# Altium PCB LedMatrixDisplay.PCBDOC (part 1 of 3)
Units mm, origin at the board's own origin, x right, y up, seen from the top; angles counter-clockwise.
Board outline 305.05 x 54.1 mm, 4 copper layers (Top Layer, POWER, GROUND, Bottom Layer); 103 components, 165 nets, 805 pads, 317 vias.
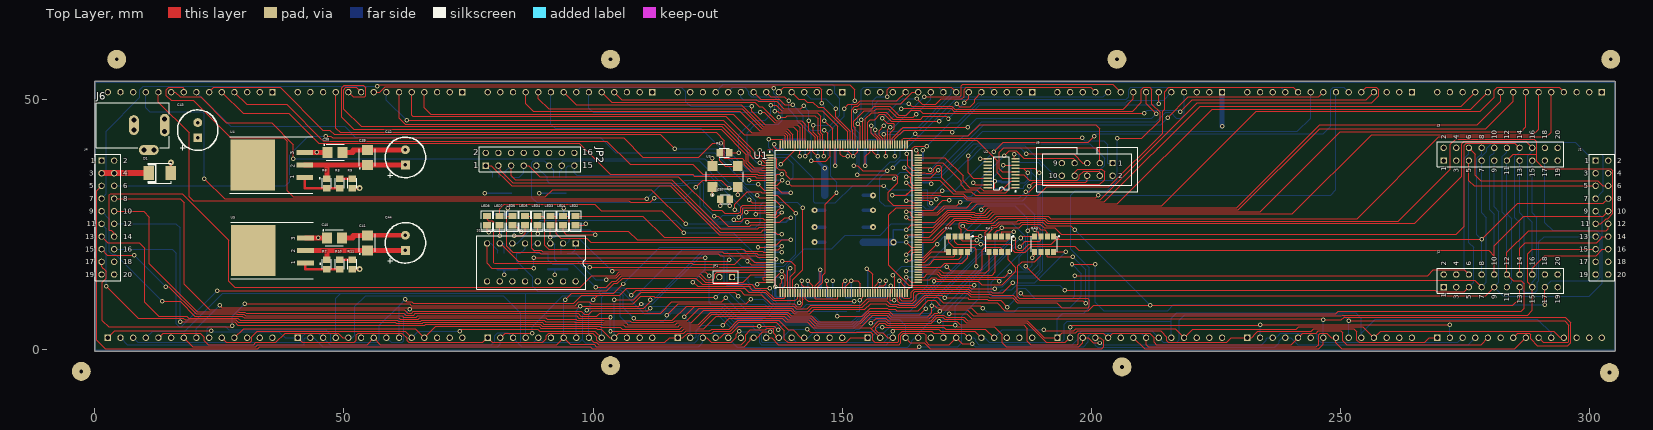
[diagram p0: Top Layer view]
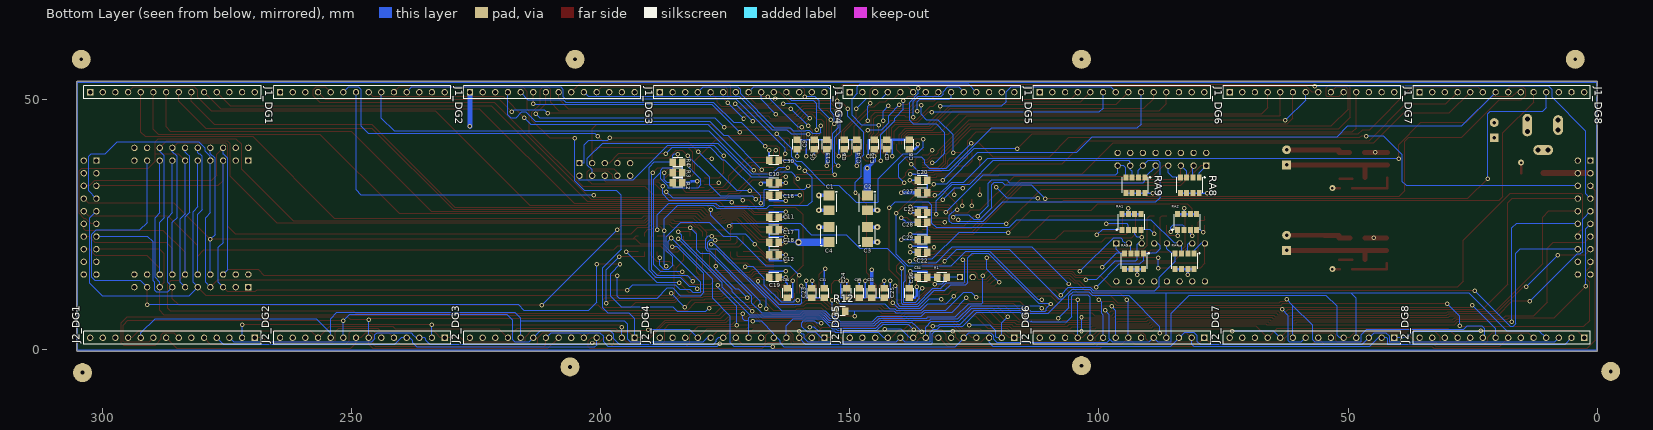
[diagram p1: Bottom Layer view, seen from below]
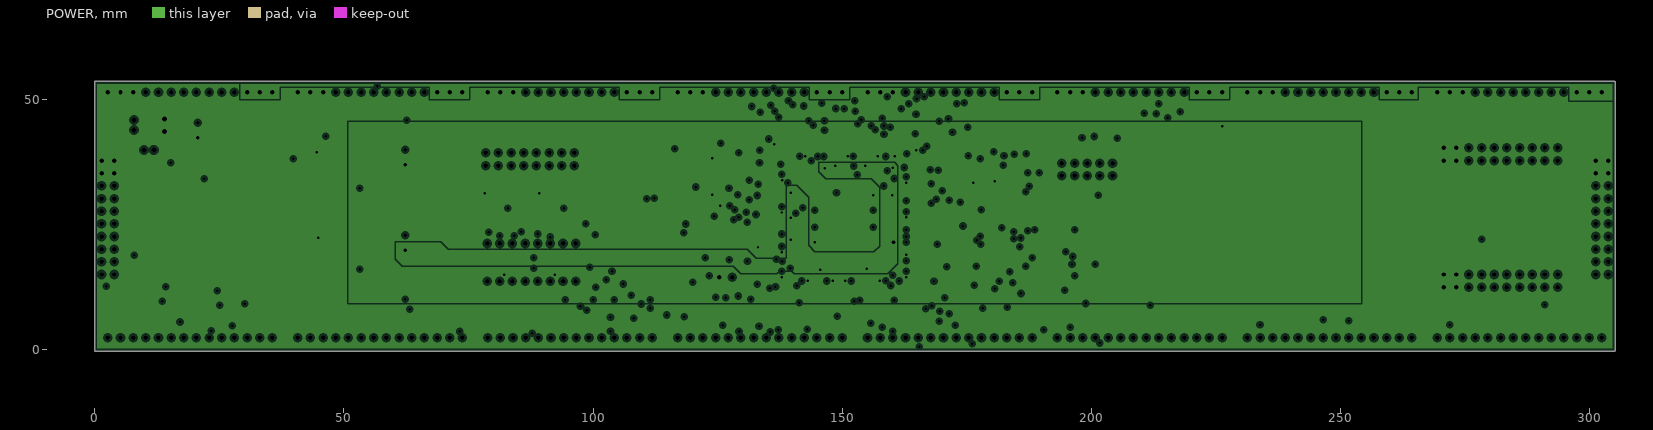
[diagram p2: POWER, clearances drawn from the general rule]
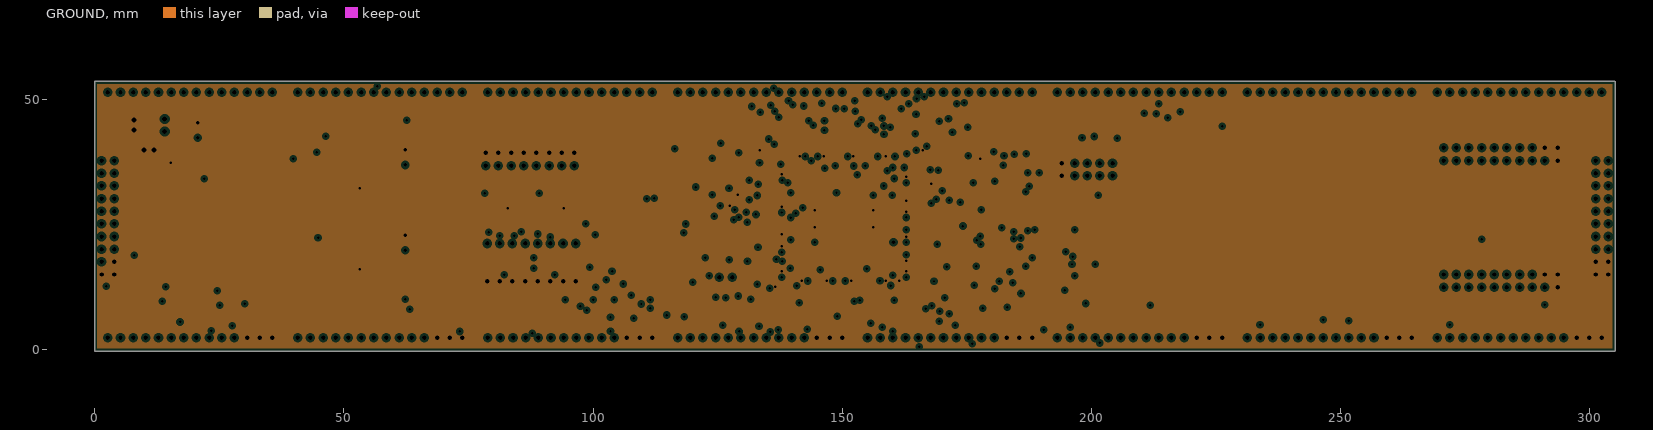
[diagram p3: GROUND, clearances drawn from the general rule]

## Layer stack, top to bottom
Top Layer: signal copper 0.0356
Dielectric: core 0.32, FR-4, Dk 4.8
POWER: plane copper 0.0356, net (Multiple Nets)
Dielectric: prepreg 0.32, FR-4, Dk 4.8
GROUND: plane copper 0.0356, net GND
Dielectric: core 0.32, FR-4, Dk 4.8
Bottom Layer: signal copper 0.0356

## Board outline
304.927,-0.381 ccw(c304.927,-0.254) 305.055,-0.254 305.055,53.594 ccw(c304.927,53.594) 304.927,53.721 0.127,53.721 ccw(c0.127,53.594) 0,53.594 0,-0.254 ccw(c0.127,-0.254) 0.127,-0.381

## Design rules (kind name [scope] priority, off if disabled: settings)
Clearance [All] p1: gap=0.2
FabricationTestPointUsage TestPointUsage [All] p1: valid=0 allowmultiple=FALSE
FabricationTestpoint Testpoint [All] p1: side=3 testpointundercomponent=TRUE minsize=1.016 maxsize=2.54 preferedsize=1.524 minholesize=0 maxholesize=1.016 preferedholesize=0.813 testpointgrid=0.025 allowsidetop=TRUE allowsidebottom=TRUE usegrid=TRUE gridtolerance=0
HoleSize HoleSize_PowerPads [IsPad And (PadXSize_AllLayers <> PadYSize_AllLayers) And OnMultiLayer] p1: absolutevalues=TRUE maxlimit=2.54 minlimit=0 maxpercent=80.000 minpercent=20.000
HoleSize [All] p2: absolutevalues=TRUE maxlimit=2.54 minlimit=0.025 maxpercent=80.000 minpercent=20.000
PlaneClearance [All] p1: clearance=0.508
PlaneConnect [All] p1: planeconnectstyle=Relief reliefexpansion=0.508 reliefentries=4 reliefconductorwidth=0.254 reliefairgap=0.254
PolygonConnect [All] p1: connectstyle=Relief reliefconductorwidth=0.254 reliefentries=4 polygonreliefangle="90 Angle"
RoomDefinition U_FPGA_U1 [InComponentClass('U_FPGA_U1')] p1: confinementstyle=ConfineIn formatcopy=TRUE lockcomponents=FALSE outline 127.635,6.096 175.895,6.096 175.895,46.736 127.635,46.736
RoomDefinition LED_SW [InComponentClass('LED_SW')] p2: confinementstyle=ConfineIn formatcopy=TRUE lockcomponents=FALSE outline 96.647,13.716 122.047,13.716 122.047,37.846 96.647,37.846
RoomDefinition DG8 [InComponentClass('DG8')] p3: confinementstyle=ConfineIn formatcopy=TRUE lockcomponents=FALSE outline 38.227,-0.254 0.127,-0.254 0.127,53.594 38.227,53.594
RoomDefinition DG7 [InComponentClass('DG7')] p4: confinementstyle=ConfineIn formatcopy=TRUE lockcomponents=FALSE outline 76.327,-0.254 38.227,-0.254 38.227,53.594 76.327,53.594
RoomDefinition DG6 [InComponentClass('DG6')] p5: confinementstyle=ConfineIn formatcopy=TRUE lockcomponents=FALSE outline 114.427,-0.254 76.327,-0.254 76.327,53.594 114.427,53.594
RoomDefinition DG5 [InComponentClass('DG5')] p6: confinementstyle=ConfineIn formatcopy=TRUE lockcomponents=FALSE outline 152.527,-0.254 114.427,-0.254 114.427,53.594 152.527,53.594
RoomDefinition DG3 [InComponentClass('DG3')] p7: confinementstyle=ConfineIn formatcopy=TRUE lockcomponents=FALSE outline 228.727,-0.254 190.627,-0.254 190.627,53.594 228.727,53.594
RoomDefinition DG2 [InComponentClass('DG2')] p8: confinementstyle=ConfineIn formatcopy=TRUE lockcomponents=FALSE outline 266.827,-0.254 228.727,-0.254 228.727,53.594 266.827,53.594
RoomDefinition DG1 [InComponentClass('DG1')] p9: confinementstyle=ConfineIn formatcopy=TRUE lockcomponents=FALSE outline 304.927,-0.254 266.827,-0.254 266.827,53.594 304.927,53.594
RoomDefinition DG4 [InComponentClass('DG4')] p10: confinementstyle=ConfineIn formatcopy=TRUE lockcomponents=FALSE outline 190.627,-0.254 152.527,-0.254 152.527,53.594 190.627,53.594
RoomDefinition PWR [InComponentClass('PWR')] p11: confinementstyle=ConfineIn formatcopy=TRUE lockcomponents=FALSE outline 204.597,13.716 270.637,13.716 270.637,41.656 204.597,41.656
RoutingVias ViasStyle_PowerNets [InNetClass('PowerNets')] p1: holewidth=0.5 width=0.9 viastyle="Through Hole" minholewidth=0.5 minwidth=0.9 maxholewidth=0.5 maxwidth=2.5
RoutingVias [All] p2: holewidth=0.5 width=0.9 viastyle="Through Hole" minholewidth=0.5 minwidth=0.9 maxholewidth=0.5 maxwidth=0.9
SilkscreenOverComponentPads [All] p1: minsilkscreentomaskgap=0.254
SolderMaskExpansion [All] p1: expansion=0.102
Width Width_Power [InNetClass('PowerNets')] p1: maxlimit=2 minlimit=0.2 preferedwidth=0.3 toplayer_prefwidth=0.2 minimp=50.000000 maximp=50.000000 favimp=50.000000
Width [All] p2: maxlimit=2 minlimit=0.2 preferedwidth=0.2
22 further rules are at their usual default settings.

## Classes and differential pairs
net class PowerNets: 6V GND VCCINT VCCO
component class DG1: C45_DG1 C46_DG1 D2_DG1 D3_DG1 GNDTP1_DG1 J1_DG1 J2_DG1 Q1_DG1 Q2_DG1 Q3_DG1 Q4_DG1 Q5_DG1 Q6_DG1 Q7_DG1 Q8_DG1 Q9_DG1 Q10_DG1 Q11_DG1 Q12_DG1 Q13_DG1 Q14_DG1 Q15_DG1 Q16_DG1 R12_DG1 R13_DG1 R14_DG1 R15_DG1 R16_DG1 R17_DG1 R18_DG1 R19_DG1 R20_DG1 R21_DG1 R22_DG1 R23_DG1 R24_DG1 R25_DG1 R26_DG1 TB_DG1 U6_DG1 U7_DG1 U8_DG1 U9_DG1
component class DG2: C45_DG2 C46_DG2 D2_DG2 D3_DG2 GNDTP1_DG2 J1_DG2 J2_DG2 Q1_DG2 Q2_DG2 Q3_DG2 Q4_DG2 Q5_DG2 Q6_DG2 Q7_DG2 Q8_DG2 Q9_DG2 Q10_DG2 Q11_DG2 Q12_DG2 Q13_DG2 Q14_DG2 Q15_DG2 Q16_DG2 R12_DG2 R13_DG2 R14_DG2 R15_DG2 R16_DG2 R17_DG2 R18_DG2 R19_DG2 R20_DG2 R21_DG2 R22_DG2 R23_DG2 R24_DG2 R25_DG2 R26_DG2 TB_DG2 U6_DG2 U7_DG2 U8_DG2 U9_DG2
component class DG3: C45_DG3 C46_DG3 D2_DG3 D3_DG3 GNDTP1_DG3 J1_DG3 J2_DG3 Q1_DG3 Q2_DG3 Q3_DG3 Q4_DG3 Q5_DG3 Q6_DG3 Q7_DG3 Q8_DG3 Q9_DG3 Q10_DG3 Q11_DG3 Q12_DG3 Q13_DG3 Q14_DG3 Q15_DG3 Q16_DG3 R12_DG3 R13_DG3 R14_DG3 R15_DG3 R16_DG3 R17_DG3 R18_DG3 R19_DG3 R20_DG3 R21_DG3 R22_DG3 R23_DG3 R24_DG3 R25_DG3 R26_DG3 TB_DG3 U6_DG3 U7_DG3 U8_DG3 U9_DG3
component class DG4: C45_DG4 C46_DG4 D2_DG4 D3_DG4 GNDTP1_DG4 J1_DG4 J2_DG4 Q1_DG4 Q2_DG4 Q3_DG4 Q4_DG4 Q5_DG4 Q6_DG4 Q7_DG4 Q8_DG4 Q9_DG4 Q10_DG4 Q11_DG4 Q12_DG4 Q13_DG4 Q14_DG4 Q15_DG4 Q16_DG4 R12_DG4 R13_DG4 R14_DG4 R15_DG4 R16_DG4 R17_DG4 R18_DG4 R19_DG4 R20_DG4 R21_DG4 R22_DG4 R23_DG4 R24_DG4 R25_DG4 R26_DG4 TB_DG4 U6_DG4 U7_DG4 U8_DG4 U9_DG4
component class DG5: C45_DG5 C46_DG5 D2_DG5 D3_DG5 GNDTP1_DG5 J1_DG5 J2_DG5 Q1_DG5 Q2_DG5 Q3_DG5 Q4_DG5 Q5_DG5 Q6_DG5 Q7_DG5 Q8_DG5 Q9_DG5 Q10_DG5 Q11_DG5 Q12_DG5 Q13_DG5 Q14_DG5 Q15_DG5 Q16_DG5 R12_DG5 R13_DG5 R14_DG5 R15_DG5 R16_DG5 R17_DG5 R18_DG5 R19_DG5 R20_DG5 R21_DG5 R22_DG5 R23_DG5 R24_DG5 R25_DG5 R26_DG5 TB_DG5 U6_DG5 U7_DG5 U8_DG5 U9_DG5
component class DG6: C45_DG6 C46_DG6 D2_DG6 D3_DG6 GNDTP1_DG6 J1_DG6 J2_DG6 Q1_DG6 Q2_DG6 Q3_DG6 Q4_DG6 Q5_DG6 Q6_DG6 Q7_DG6 Q8_DG6 Q9_DG6 Q10_DG6 Q11_DG6 Q12_DG6 Q13_DG6 Q14_DG6 Q15_DG6 Q16_DG6 R12_DG6 R13_DG6 R14_DG6 R15_DG6 R16_DG6 R17_DG6 R18_DG6 R19_DG6 R20_DG6 R21_DG6 R22_DG6 R23_DG6 R24_DG6 R25_DG6 R26_DG6 TB_DG6 U6_DG6 U7_DG6 U8_DG6 U9_DG6
component class DG7: C45_DG7 C46_DG7 D2_DG7 D3_DG7 GNDTP1_DG7 J1_DG7 J2_DG7 Q1_DG7 Q2_DG7 Q3_DG7 Q4_DG7 Q5_DG7 Q6_DG7 Q7_DG7 Q8_DG7 Q9_DG7 Q10_DG7 Q11_DG7 Q12_DG7 Q13_DG7 Q14_DG7 Q15_DG7 Q16_DG7 R12_DG7 R13_DG7 R14_DG7 R15_DG7 R16_DG7 R17_DG7 R18_DG7 R19_DG7 R20_DG7 R21_DG7 R22_DG7 R23_DG7 R24_DG7 R25_DG7 R26_DG7 TB_DG7 U6_DG7 U7_DG7 U8_DG7 U9_DG7
component class DG8: C45_DG8 C46_DG8 D2_DG8 D3_DG8 GNDTP1_DG8 J1_DG8 J2_DG8 Q1_DG8 Q2_DG8 Q3_DG8 Q4_DG8 Q5_DG8 Q6_DG8 Q7_DG8 Q8_DG8 Q9_DG8 Q10_DG8 Q11_DG8 Q12_DG8 Q13_DG8 Q14_DG8 Q15_DG8 Q16_DG8 R12_DG8 R13_DG8 R14_DG8 R15_DG8 R16_DG8 R17_DG8 R18_DG8 R19_DG8 R20_DG8 R21_DG8 R22_DG8 R23_DG8 R24_DG8 R25_DG8 R26_DG8 TB_DG8 U6_DG8 U7_DG8 U8_DG8 U9_DG8
component class LED_SW: JP2 LED1 LED2 LED3 LED4 LED5 LED6 LED7 LED8 RA1 RA2 RA3 RA4 RA8 RA9 S1
component class LedMatrixDisplay: C37 EN1 J1 J2 J3 J4 J5 R5 R27 RA5 RA6 RA7 U3
component class PWR: C38 C39 C40 C41 C42 C43 C44 D1 J6 R6 R7 R8 R9 R10 R11 U4 U5
component class U_FPGA_U1_Auto: U1
component class U_FPGA_U1: C1 C2 C3 C4 C5 C6 C7 C8 C9 C10 C11 C12 C13 C14 C15 C16 C17 C18 C19 C20 C21 C22 C23 C24 C25 C26 C27 C28 C29 C30 C31 C32 C34 C35 C36 JP1 R1 R2 R3 R4 U2
net class ADDR[2..0]: ADDR0 ADDR1 ADDR2
net class BOARD_ADDR[7..0]: SW0 SW1 SW2 SW3 SW4 SW5 SW6 SW7
net class DATA[7..0]: DATA0 DATA1 DATA2 DATA3 DATA4 DATA5 DATA6 DATA7
net class GREEN[4..0]: GREEN0 GREEN1 GREEN2 GREEN3 GREEN4
net class LED[7..0]: LED0 LED1 LED2 LED3 LED4 LED5 LED6 LED7
net class RED[4..0]: RED0 RED1 RED2 RED3 RED4
net class ROWA[6..0]: ROWA0 ROWA1 ROWA2 ROWA3 ROWA4 ROWA5 ROWA6
net class ROWB[6..0]: ROWB0 ROWB1 ROWB2 ROWB3 ROWB4 ROWB5 ROWB6
net class ROWC[6..0]: ROWC0 ROWC1 ROWC2 ROWC3 ROWC4 ROWC5 ROWC6
net class ROWD[6..0]: ROWD0 ROWD1 ROWD2 ROWD3 ROWD4 ROWD5 ROWD6
net class ROWE[6..0]: ROWE0 ROWE1 ROWE2 ROWE3 ROWE4 ROWE5 ROWE6
net class ROWF[6..0]: ROWF0 ROWF1 ROWF2 ROWF3 ROWF4 ROWF5 ROWF6
net class ROWG[6..0]: ROWG0 ROWG1 ROWG2 ROWG3 ROWG4 ROWG5 ROWG6
net class ROWH[6..0]: ROWH0 ROWH1 ROWH2 ROWH3 ROWH4 ROWH5 ROWH6
net class JUMPERS[7..0]: JUMPERS0 JUMPERS1 JUMPERS2 JUMPERS3 JUMPERS4 JUMPERS5 JUMPERS6 JUMPERS7
channel class DigitHolder: DG1 DG2 DG3 DG4 DG5 DG6 DG7 DG8
net class ENABLE[7..0]: ENABLE0 ENABLE1 ENABLE2 ENABLE3 ENABLE4 ENABLE5 ENABLE6 ENABLE7

## Components (designator, comment, footprint, x,y, rotation, side; value= is the part's Value field where it differs from the comment)
C1 "10uF" MCCT-B 154.177,29.373 r270 bottom locked
C2 "10uF" MCCT-B 146.477,29.373 r270 bottom locked
C3 "10uF" MCCT-B 146.477,22.973 r90 bottom locked
C4 "10uF" MCCT-B 154.177,22.973 r90 bottom locked
C5 "0.1uF" CC2012-0805 157.077,41.073 r270 bottom
C6 "0.1uF" CC2012-0805 151.077,41.073 r270 bottom
C7 "0.1uF" CC2012-0805 142.577,41.073 r270 bottom
C8 "0.1uF" CC2012-0805 138.077,41.073 r270 bottom
C9 "0.1uF" CC2012-0805 160.577,41.073 r270 bottom
C10 "0.1uF" CC2012-0805 165.227,33.423 r180 bottom
C11 "0.1uF" CC2012-0805 165.227,26.423 r180 bottom
C12 "0.1uF" CC2012-0805 165.227,18.923 r180 bottom
C13 "0.1uF" CC2012-0805 154.577,41.073 r270 bottom
C14 "0.1uF" CC2012-0805 148.577,41.073 r270 bottom
C15 "0.1uF" CC2012-0805 145.077,41.073 r270 bottom
C16 "0.1uF" CC2012-0805 165.227,30.923 r180 bottom
C17 "0.1uF" CC2012-0805 165.227,23.923 r180 bottom
C18 "0.1uF" CC2012-0805 165.227,21.423 r180 bottom
C19 "0.1uF" CC2012-0805 165.227,14.423 r0 bottom
C20 "0.1uF" CC2012-0805 135.427,33.923 r180 bottom
C21 "0.1uF" CC2012-0805 135.427,27.423 r180 bottom
C22 "0.1uF" CC2012-0805 135.427,19.423 r180 bottom
C23 "0.1uF" CC2012-0805 157.577,11.273 r270 bottom
C24 "0.1uF" CC2012-0805 150.577,11.273 r270 bottom
C25 "0.1uF" CC2012-0805 143.077,11.273 r270 bottom
C26 "0.1uF" CC2012-0805 138.077,11.273 r270 bottom
C27 "0.1uF" CC2012-0805 135.427,31.423 r180 bottom
C28 "0.1uF" CC2012-0805 135.427,25.423 r180 bottom
C29 "0.1uF" CC2012-0805 135.427,21.923 r180 bottom
C30 "0.1uF" CC2012-0805 165.227,37.923 r0 bottom
C31 "0.1uF" CC2012-0805 155.077,11.273 r270 bottom
C32 "0.1uF" CC2012-0805 145.577,11.273 r270 bottom
C34 "100nF" CC2012-0805 135.427,14.423 r0 bottom
C35 "100nF" CC2012-0805 148.077,11.273 r90 bottom
C36 "100nF" CC2012-0805 162.577,11.273 r90 bottom
C37 "100nF" CC2012-0805 126.492,30.099 r0 top
C38 "10uF" MCCT-B 48.26,39.497 r0 top locked
C39 "10uF" MCCT-B 54.737,38.457 r90 top locked
C40 "10uF" MCCT-B 48.109,22.352 r0 top locked
C41 "10uF" MCCT-B 54.737,21.312 r90 top locked
C42 "470uF 16V" RB8/3.5 62.357,38.481 r180 top
C43 "470uF 16V" RB8/3.5 20.701,43.942 r180 top
C44 "470uF 16V" RB8/3.5 62.357,21.336 r180 top
D1 "SMBJ5341B" DO214 13.081,35.306 r180 top
J1 "Header 20" HDR2X10 301.117,37.846 r270 top
J1_DG1 "Header 14" HDR1X14 302.387,51.562 r180 bottom (schematic designator J1)
J1_DG2 "Header 14" HDR1X14 264.287,51.562 r180 bottom (schematic designator J1)
J1_DG3 "Header 14" HDR1X14 226.187,51.562 r180 bottom (schematic designator J1)
J1_DG4 "Header 14" HDR1X14 188.087,51.562 r180 bottom (schematic designator J1)
J1_DG5 "Header 14" HDR1X14 149.987,51.562 r180 bottom (schematic designator J1)
J1_DG6 "Header 14" HDR1X14 111.887,51.562 r180 bottom (schematic designator J1)
J1_DG7 "Header 14" HDR1X14 73.787,51.562 r180 bottom (schematic designator J1)
J1_DG8 "Header 14" HDR1X14 35.687,51.562 r180 bottom (schematic designator J1)
J2 "Header 20" HDR2X10 270.637,12.446 r0 top
J2_DG1 "Header 14" HDR1X14 269.367,2.286 r0 bottom (schematic designator J2)
J2_DG2 "Header 14" HDR1X14 231.267,2.286 r0 bottom (schematic designator J2)
J2_DG3 "Header 14" HDR1X14 193.167,2.286 r0 bottom (schematic designator J2)
J2_DG4 "Header 14" HDR1X14 155.067,2.286 r0 bottom (schematic designator J2)
J2_DG5 "Header 14" HDR1X14 116.967,2.286 r0 bottom (schematic designator J2)
J2_DG6 "Header 14" HDR1X14 78.867,2.286 r0 bottom (schematic designator J2)
J2_DG7 "Header 14" HDR1X14 40.767,2.286 r0 bottom (schematic designator J2)
J2_DG8 "Header 14" HDR1X14 2.667,2.286 r0 bottom (schematic designator J2)
J3 "Header 20" HDR2X10 270.637,37.846 r0 top
J4 "Header 20" HDR2X10 1.397,37.846 r270 top
J5 "70246-1022" HDR2X5_LP 204.217,37.338 r180 top
J6 "KLD-0202-B" KLD-0202 0.381,44.958 r0 top
JP1 "Header 2" HDR1X2 127.889,14.478 r180 top
JP2 "Header 8X2" HDR2X8 78.487,36.83 r0 top
LED1 "HSMH-C170" "SMD _LED" 93.98,25.781 r90 top
LED2 "HSMH-C170" "SMD _LED" 96.52,25.781 r90 top
LED3 "HSMH-C170" "SMD _LED" 91.44,25.781 r90 top
LED4 "HSMH-C170" "SMD _LED" 88.9,25.781 r90 top
LED5 "HSMH-C170" "SMD _LED" 86.36,25.781 r90 top
LED6 "HSMH-C170" "SMD _LED" 83.82,25.781 r90 top
LED7 "HSMH-C170" "SMD _LED" 81.28,25.781 r90 top
LED8 "HSMH-C170" "SMD _LED" 78.74,25.781 r90 top
R1 "1K" CC2012-0805 131.495,14.423 r180 bottom
R2 "4K7" CC2012-0805 184.531,33.401 r0 bottom
R3 "4K7" CC2012-0805 184.531,35.433 r0 bottom
R4 "4K7" CC2012-0805 184.531,37.465 r0 bottom
R5 "33R" CC2012-0805 126.365,39.37 r0 top
R6 "120R" CC2012-0805 46.609,33.274 r270 top locked
R7 "120R" CC2012-0805 46.609,17.018 r270 top locked
R8 "100R" CC2012-0805 49.149,33.274 r90 top locked
R9 "100R" CC2012-0805 51.689,33.274 r90 top locked
R10 "47R" CC2012-0805 49.149,17.018 r90 top locked
R11 "5R6" CC2012-0805 51.689,17.018 r270 top locked
R12 "47R" CC2012-0805 151.892,7.62 r180 bottom
RA1 "270R" MNR34 93.472,25.527 r90 bottom
RA2 "270R" MNR34 82.296,25.527 r90 bottom
RA3 "4K7" MNR34 92.964,17.653 r270 bottom
RA4 "4K7" MNR34 82.804,17.653 r270 bottom
RA5 "47R" MNR34 190.501,21.082 r270 top
RA6 "47R" MNR34 173.229,21.082 r270 top
RA7 "47R" MNR34 181.357,21.082 r270 top
RA8 "4K7" MNR34 81.788,32.893 r270 bottom
RA9 "4K7" MNR34 92.71,32.893 r270 bottom
S1 "A6ER-8104" DIP-16-KEY 96.52,21.209 r180 top
U1 "XC2S300E-6PQ208C" PQ208 150.327,26.173 r0 top locked
U2 "XCF02SVO20C" VO20 181.991,35.306 r90 top
U3 "QSMO_4200" QSMO_4200 123.952,32.131 r0 top
U4 "LM1084IS-ADJ" TO-263 42.164,34.417 r90 top
U5 "LM1084IS-ADJ" TO-263 42.291,17.272 r90 top

## Footprints (in the part's own frame and the unit in brackets; to place one, negate y for a bottom-side part, rotate by r counter-clockwise, add the part's x,y. Pads: shape width x height; smd on the part's side, far side on the other; paste and mask are expansions set on the pad)
CC2012-0805 [mm]
  rect 1.3x1.5 smd: 1(-0.95,0) 2(0.95,0)
  silkscreen extent -1,-0.9 1,0.9
DIP-16-KEY [mm]
  rect 1.27x1.27 hole 0.9: 1(0,0)
  round 1.27 hole 0.9: 2(2.54,0) 3(5.08,0) 4(7.62,0) 5(10.16,0) 6(12.7,0) 7(15.24,0) 8(17.78,0) 9(17.78,7.62) 10(15.24,7.62) 11(12.7,7.62) 12(10.16,7.62) 13(7.62,7.62) 14(5.08,7.62) 15(2.54,7.62) 16(0,7.62)
  silkscreen extent -2.05,-1.59 19.83,9.2
DO214 [mil]
  rect 85x110 smd: 1(-87.5,0) 2(87.5,0)
  silkscreen extent -90,-78 90,78
HDR1X2 [mm]
  rect 1.27x1.27 hole 0.9: 1(0,0)
  round 1.27 hole 0.9: 2(2.54,0)
  silkscreen extent -1.27,-1.27 3.81,1.27
HDR1X14 [mm]
  rect 1.27x1.27 hole 0.9: 1(0,0)
  round 1.27 hole 0.9: 2(2.54,0) 3(5.08,0) 4(7.62,0) 5(10.16,0) 6(12.7,0) 7(15.24,0) 8(17.78,0) 9(20.32,0) 10(22.86,0) 11(25.4,0) 12(27.94,0) 13(30.48,0) 14(33.02,0)
  silkscreen extent -1.27,-1.27 34.29,1.27
HDR2X5_LP [mm]
  rect 1.27x1.27 hole 0.9: 1(0,0)
  round 1.27 hole 0.9: 2(0,2.54) 3(2.54,0) 4(2.54,2.54) 5(5.08,0) 6(5.08,2.54) 7(7.62,0) 8(7.62,2.54) 9(10.16,0) 10(10.16,2.54)
  silkscreen extent -5.08,-3.18 15.24,5.72
HDR2X8 [mm]
  rect 1.27x1.27 hole 0.9: 1(0,0)
  round 1.27 hole 0.9: 2(0,2.54) 3(2.54,0) 4(2.54,2.54) 5(5.08,0) 6(5.08,2.54) 7(7.62,0) 8(7.62,2.54) 9(10.16,0) 10(10.16,2.54) 11(12.7,0) 12(12.7,2.54) 13(15.24,0) 14(15.24,2.54) 15(17.78,0) 16(17.78,2.54)
  silkscreen extent -1.27,-1.27 19.05,3.81
HDR2X10 [mm]
  rect 1.27x1.27 hole 0.9: 1(0,0)
  round 1.27 hole 0.9: 2(0,2.54) 3(2.54,0) 4(2.54,2.54) 5(5.08,0) 6(5.08,2.54) 7(7.62,0) 8(7.62,2.54) 9(10.16,0) 10(10.16,2.54) 11(12.7,0) 12(12.7,2.54) 13(15.24,0) 14(15.24,2.54) 15(17.78,0) 16(17.78,2.54) 17(20.32,0) 18(20.32,2.54) 19(22.86,0) 20(22.86,2.54)
  silkscreen extent -1.27,-1.27 24.13,3.81
KLD-0202 [mm] "PCB Mount DC Power Jack with 2.1mm or 2.5mm center pin"
  oval 2x4.5 all layers, no hole: 1(13.7,0)
  round 1.5 hole 1: 1A(13.7,-1.25) 1B(13.7,1.25) 2A(9.5,-5) 2B(11.5,-5) 3A(7.5,-1) 3B(7.5,1)
  oval 4x2 all layers, no hole: 2(10.5,-5)
  oval 2x4 all layers, no hole: 3(7.5,0)
  silkscreen extent 0,-4.5 14.6,4.5
MCCT-B [mm]
  rect 2x2.2 smd: 1(-1.5,0) 2(1.5,0)
  silkscreen extent -2.3,-1.6 1.8,1.6
MNR34 [mm]
  rect 1.2x1 smd: 1(-1.575,1.905) 2(-1.575,0.635) 3(-1.575,-0.635) 4(-1.575,-1.905) 5(1.575,-1.905) 6(1.575,-0.635) 7(1.575,0.635) 8(1.575,1.905)
  silkscreen extent -1.67,-2.62 1.55,3.07
PQ208 [mm] "208-Pin Plastic Quad Flat Pack (PQ208)"
  rect 1.55x0.3 smd: 1(-14.9,12.75) 2(-14.9,12.25) 3(-14.9,11.75) 4(-14.9,11.25) 5(-14.9,10.75) 6(-14.9,10.25) 7(-14.9,9.75) 8(-14.9,9.25) 9(-14.9,8.75) 10(-14.9,8.25) 11(-14.9,7.75) 12(-14.9,7.25) 13(-14.9,6.75) 14(-14.9,6.25) 15(-14.9,5.75) 16(-14.9,5.25) 17(-14.9,4.75) 18(-14.9,4.25) 19(-14.9,3.75) 20(-14.9,3.25) 21(-14.9,2.75) 22(-14.9,2.25) 23(-14.9,1.75) 24(-14.9,1.25) 25(-14.9,0.75) 26(-14.9,0.25) 27(-14.9,-0.25) 28(-14.9,-0.75) 29(-14.9,-1.25) 30(-14.9,-1.75) 31(-14.9,-2.25) 32(-14.9,-2.75) 33(-14.9,-3.25) 34(-14.9,-3.75) 35(-14.9,-4.25) 36(-14.9,-4.75) 37(-14.9,-5.25) 38(-14.9,-5.75) 39(-14.9,-6.25) 40(-14.9,-6.75) 41(-14.9,-7.25) 42(-14.9,-7.75) 43(-14.9,-8.25) 44(-14.9,-8.75) 45(-14.9,-9.25) 46(-14.9,-9.75) 47(-14.9,-10.25) 48(-14.9,-10.75) 49(-14.9,-11.25) 50(-14.9,-11.75) 51(-14.9,-12.25) 52(-14.9,-12.75) 105(14.9,-12.75) 106(14.9,-12.25) 107(14.9,-11.75) 108(14.9,-11.25) 109(14.9,-10.75) 110(14.9,-10.25) 111(14.9,-9.75) 112(14.9,-9.25) 113(14.9,-8.75) 114(14.9,-8.25) 115(14.9,-7.75) 116(14.9,-7.25) 117(14.9,-6.75) 118(14.9,-6.25) 119(14.9,-5.75) 120(14.9,-5.25) 121(14.9,-4.75) 122(14.9,-4.25) 123(14.9,-3.75) 124(14.9,-3.25) 125(14.9,-2.75) 126(14.9,-2.25) 127(14.9,-1.75) 128(14.9,-1.25) 129(14.9,-0.75) 130(14.9,-0.25) 131(14.9,0.25) 132(14.9,0.75) 133(14.9,1.25) 134(14.9,1.75) 135(14.9,2.25) 136(14.9,2.75) 137(14.9,3.25) 138(14.9,3.75) 139(14.9,4.25) 140(14.9,4.75) 141(14.9,5.25) 142(14.9,5.75) 143(14.9,6.25) 144(14.9,6.75) 145(14.9,7.25) 146(14.9,7.75) 147(14.9,8.25) 148(14.9,8.75) 149(14.9,9.25) 150(14.9,9.75) 151(14.9,10.25) 152(14.9,10.75) 153(14.9,11.25) 154(14.9,11.75) 155(14.9,12.25) 156(14.9,12.75)
  rect 0.3x1.55 smd: 53(-12.75,-14.9) 54(-12.25,-14.9) 55(-11.75,-14.9) 56(-11.25,-14.9) 57(-10.75,-14.9) 58(-10.25,-14.9) 59(-9.75,-14.9) 60(-9.25,-14.9) 61(-8.75,-14.9) 62(-8.25,-14.9) 63(-7.75,-14.9) 64(-7.25,-14.9) 65(-6.75,-14.9) 66(-6.25,-14.9) 67(-5.75,-14.9) 68(-5.25,-14.9) 69(-4.75,-14.9) 70(-4.25,-14.9) 71(-3.75,-14.9) 72(-3.25,-14.9) 73(-2.75,-14.9) 74(-2.25,-14.9) 75(-1.75,-14.9) 76(-1.25,-14.9) 77(-0.75,-14.9) 78(-0.25,-14.9) 79(0.25,-14.9) 80(0.75,-14.9) 81(1.25,-14.9) 82(1.75,-14.9) 83(2.25,-14.9) 84(2.75,-14.9) 85(3.25,-14.9) 86(3.75,-14.9) 87(4.25,-14.9) 88(4.75,-14.9) 89(5.25,-14.9) 90(5.75,-14.9) 91(6.25,-14.9) 92(6.75,-14.9) 93(7.25,-14.9) 94(7.75,-14.9) 95(8.25,-14.9) 96(8.75,-14.9) 97(9.25,-14.9) 98(9.75,-14.9) 99(10.25,-14.9) 100(10.75,-14.9) 101(11.25,-14.9) 102(11.75,-14.9) 103(12.25,-14.9) 104(12.75,-14.9) 157(12.75,14.9) 158(12.25,14.9) 159(11.75,14.9) 160(11.25,14.9) 161(10.75,14.9) 162(10.25,14.9) 163(9.75,14.9) 164(9.25,14.9) 165(8.75,14.9) 166(8.25,14.9) 167(7.75,14.9) 168(7.25,14.9) 169(6.75,14.9) 170(6.25,14.9) 171(5.75,14.9) 172(5.25,14.9) 173(4.75,14.9) 174(4.25,14.9) 175(3.75,14.9) 176(3.25,14.9) 177(2.75,14.9) 178(2.25,14.9) 179(1.75,14.9) 180(1.25,14.9) 181(0.75,14.9) 182(0.25,14.9) 183(-0.25,14.9) 184(-0.75,14.9) 185(-1.25,14.9) 186(-1.75,14.9) 187(-2.25,14.9) 188(-2.75,14.9) 189(-3.25,14.9) 190(-3.75,14.9) 191(-4.25,14.9) 192(-4.75,14.9) 193(-5.25,14.9) 194(-5.75,14.9) 195(-6.25,14.9) 196(-6.75,14.9) 197(-7.25,14.9) 198(-7.75,14.9) 199(-8.25,14.9) 200(-8.75,14.9) 201(-9.25,14.9) 202(-9.75,14.9) 203(-10.25,14.9) 204(-10.75,14.9) 205(-11.25,14.9) 206(-11.75,14.9) 207(-12.25,14.9) 208(-12.75,14.9)
  silkscreen extent -15.02,-13.73 13.72,13.73
QSMO_4200 [mm]
  rect 2x2 smd: 1(0,0.4) 2(5.08,0.4) 3(5.08,4.6) 4(0,4.6)
  silkscreen extent -1.19,-1.31 6.22,4.95
RB8/3.5 [mil]
  rect 70x70 hole 27.56: 1(0,60)
  round 70 hole 27.56: 2(0,-60)
  silkscreen extent -160,-160 160,160
"SMD _LED" [mm]
  rect 1.3x1.6 smd: 1(0.94,0) 2(-0.96,0)
  silkscreen extent -2.14,-1.15 1.99,1.15
TO-263 [mm]
  rect 1x3.4 smd: 1(0,0) 2(2.54,0) 3(5.08,0)
  rect 10.25x8.9 smd: 4(2.54,10.45)
  silkscreen extent -3.1,-3.13 8.2,15
VO20 [mm]
  rect 0.3x1.65 smd: 1(-2.929,-2.766) 2(-2.279,-2.766) 3(-1.629,-2.766) 4(-0.979,-2.766) 5(-0.329,-2.766) 6(0.321,-2.766) 7(0.971,-2.766) 8(1.621,-2.766) 9(2.271,-2.766) 10(2.921,-2.766) 11(2.921,2.784) 12(2.271,2.784) 13(1.621,2.784) 14(0.971,2.784) 15(0.321,2.784) 16(-0.329,2.784) 17(-0.979,2.784) 18(-1.629,2.784) 19(-2.279,2.784) 20(-2.929,2.784)
  silkscreen extent -3.75,-2.89 3.3,1.56

## Part data
C1 C2 C3 C4 C38 C39 C40 C41 C42 C43 C44: library part CAP_POLAR, "Polar Capacitor"
C5 C6 C7 C8 C9 C10 C11 C12 C13 C14 C15 C16 C17 C18 C19 C20 C21 C22 C23 C24 C25 C26 C27 C28 C29 C30 C31 C32 C34 C35 C36 C37: library part CAP, "Capacitor"
D1: library part BZG03C13, "Zener Diode, 6.2V, 5W"
J1 J2 J3 J4: "Header, 20-Pin"
J1_DG1 J1_DG2 J1_DG3 J1_DG4 J1_DG5 J1_DG6 J1_DG7 J1_DG8 J2_DG1 J2_DG2 J2_DG3 J2_DG4 J2_DG5 J2_DG6 J2_DG7 J2_DG8: "Header, 14-Pin"
J5: library part "Header 5X2", "Header, 5-Pin, Dual row"
J6: "Low Voltage Power Supply Connector"
JP1: "Header, 2-Pin"
JP2: "Header, 8-Pin, Dual row"
LED1 LED2 LED3 LED4 LED5 LED6 LED7 LED8: library part HSMX-C670, "Typical RED GaAs SMD LED Agilent make"
R1 R2 R3 R4 R5 R6 R7 R8 R9 R10 R11 R12: library part RES, "Resistor"
RA1 RA2 RA3 RA4 RA5 RA6 RA7 RA8 RA9: library part MNR34, "3216x4 Resistor Array"
S1: "DIP Switch Side actuator long liver Piano Key"
U1: "Spartan-IIE 1.8V FPGA, 208-Pin PQFP, Standard Performance, Commercial Grade"
U2: "XCF00S Series, Platform Flash In-System Programmable Configuration 3.3V PROM, 20-Pin TSOP, 2-Megabit, Commercial Grade"
U3: "Surface Mount Crystal Oscillator"
U4 U5: "5A Low Dropout Possitive Regulators"

## Free pads (board coordinates)
  round 3.81 hole 0.762: 1(4.445,58.166) 2(304.165,58.166) 3(303.911,-4.699) 4(-2.667,-4.445) 5(103.505,58.166) 6(205.105,58.166) 7(103.505,-3.302) 8(206.121,-3.556)

## Via types
v1: diameter 0.9, hole 0.5, Top Layer to Bottom Layer, 307 vias
v2: diameter 1.2, hole 0.5, Top Layer to Bottom Layer, 9 vias
v3: diameter 1.27, hole 0.711, Top Layer to Bottom Layer, 1 vias

## Nets (pads, with @x,y where several pads share a name; then routed paths per layer and width w, separated by ;. In a path a pad name is that pad's centre, name@x,y a point inside that pad or via, vN(x,y) a via of type N, cw(c..) or ccw(c..) an arc to the next point about the centre after c; other vN are vias at no path point)
6V: C38.1 C40.1 C43.1 D1.2 J1.1 J1.2 J1.3 J1.4 J1_DG1.12 J1_DG1.13 J1_DG1.14 J1_DG2.12 J1_DG2.13 J1_DG2.14 J1_DG3.12 J1_DG3.13 J1_DG3.14 J1_DG4.12 J1_DG4.13 J1_DG4.14 J1_DG5.12 J1_DG5.13 J1_DG5.14 J1_DG6.12 J1_DG6.13 J1_DG6.14 J1_DG7.12 J1_DG7.13 J1_DG7.14 J1_DG8.12 J1_DG8.13 J1_DG8.14 J2.1 J2.2 J2.3 J2.4 J3.1 J3.2 J3.3 J3.4 J4.1 J4.2 J4.3 J4.4 J6.1 J6.1A J6.1B U4.3 U5.3 | length 18.4
  Top Layer w1: U4.3@42.164,39.497 v1(44.577,39.497) C38.1@46.76,39.497 ; U5.3@42.291,22.352 v1(44.831,22.352) C40.1@46.609,22.352
  Top Layer w1.2: J4.3@1.397,35.306 J4.4@3.937,35.306 D1.2@10.859,35.306
ADDR0: RA7.5 U1.110 | length 18.3
  Top Layer w0.2: U1.110@165.227,15.923 169.599,15.923 170.231,15.291 178.791,15.291 179.452,15.952 RA7.5@179.452,19.507
ADDR1: RA7.6 U1.109 | length 20
  Top Layer w0.2: U1.109@165.227,15.423 166.193,15.423 166.263,15.494 169.215,15.494 169.825,14.884 180.061,14.884 180.722,15.545 RA7.6@180.722,19.507
ADDR2: RA7.7 U1.97 | length 33.3
  Top Layer w0.2: U1.97@159.577,11.273 159.577,9.779 v1(160.401,9.779) ; v1(170.942,16.51) 171.755,15.697 177.673,15.697 178.08,16.104 178.08,19.812 178.689,20.422 181.738,20.422 181.992,20.168 RA7.7@181.992,19.507
  Bottom Layer w0.2: v1(160.401,9.779) 161.163,9.779 161.163,9.373 163.653,9.373 167.132,12.852 167.132,14.275 169.368,16.51 v1(170.942,16.51)
CCLK: U1.155 U2.3 | length 23.6
  Top Layer w0.2: U1.155@165.227,38.423 170.568,38.423 174.244,34.747 174.244,33.782 175.591,32.436 177.724,32.436 178.334,31.826 181.915,31.826 183.766,33.677 U2.3@184.758,33.677
CLK_MHZ40: R5.2 U1.185 | length 34.3
  Top Layer w0.2: R5.2@127.315,39.37 v1(129.21,39.37) ; v1(135.662,48.946) 136.779,48.946 137.897,47.828 145.974,47.828 149.077,44.725 U1.185@149.077,41.073
  Bottom Layer w0.2: v1(129.21,39.37) 129.21,42.977 132.207,45.974 134.519,45.974 135.662,47.117 v1(135.662,48.946)
CNT5: J1.5 J2.5 J3.5 J4.5 RA5.4 | length 403.1
  Top Layer w0.2: J4.5@1.397,32.766 0.458,31.826 0.458,1.778 2.109,0.127 32.766,0.127 33.173,0.533 99.467,0.533 99.873,0.127 164.999,0.127 v1(165.405,0.533) ; v1(185.801,22.25) 186.208,22.657 ; v1(185.801,22.377) 186.081,22.657 RA5.4@188.596,22.657 ; v1(194.615,11.811) 268.986,11.811 269.317,11.481 274.752,11.481 J2.5@275.717,12.446 ; J3.5@275.717,37.846 275.717,33.782 276.733,32.766 J1.5@301.117,32.766
  Bottom Layer w0.2: v1(165.405,0.533) 173.203,0.533 173.94,1.27 173.94,6.655 177.47,10.185 177.47,14.046 v1(185.801,22.377) ; v1(185.801,22.25) 186.36,21.692 186.36,19.964 179.858,13.462 179.858,11.582 180.112,11.328 181.407,11.328 182.017,11.938 183.965,11.938 184.854,12.827 193.599,12.827 v1(194.615,11.811) ; J2.5@275.717,12.446 276.657,13.386 276.657,20.447 275.717,21.387 J3.5@275.717,37.846
CNT6: J1.6 J2.6 J3.6 J4.6 RA5.3 | length 395.8
  Top Layer w0.2: v1(46.381,42.748) 47.422,42.748 47.752,42.418 106.122,42.418 110.008,38.532 121.235,38.532 124.054,41.351 v1(125.603,41.351) ; v1(139.065,33.401) 139.725,32.741 v1(158.319,32.741) ; v1(185.598,20.574) 186.716,21.692 189.662,21.692 189.866,21.895 RA5.3@189.866,22.657 189.408,22.657 189.408,23.571 188.951,23.571 v1(188.595,23.927) ; v1(196.596,14.732) 196.647,14.783 267.437,14.783 268.58,15.926 274.778,15.926 J2.6@275.717,14.986 ; J3.6@275.717,40.386 276.987,39.116 276.987,34.874 278.054,33.807 301.549,33.807 302.591,32.766 J1.6@303.657,32.766
  Bottom Layer w0.2: J4.6@3.937,32.766 38.278,32.766 39.142,33.63 39.142,38.989 42.901,42.748 v1(46.381,42.748) ; v1(125.603,41.351) 130.734,36.22 133.985,36.22 134.576,36.811 134.972,37.208 134.972,37.944 135.509,38.481 138.811,38.481 140.208,37.084 140.208,34.544 v1(139.065,33.401) ; v1(158.319,32.741) 159.081,31.979 167.132,31.979 167.132,28.905 167.488,28.55 176.099,28.55 176.734,29.185 186.411,29.185 188.595,27 v1(188.595,23.927) ; v1(185.598,20.574) 184.564,20.574 179.248,15.258 179.248,11.43 180.01,10.668 183.896,10.668 185.42,12.192 186.69,12.192 188.722,10.16 196.088,10.16 196.596,10.668 v1(196.596,14.732) ; J2.6@275.717,14.986 274.778,15.926 274.778,38.278 275.616,39.116 275.717,39.116 J3.6@275.717,40.386
CNT7: J1.7 J2.7 J3.7 J4.7 RA5.2 | length 402.8
  Top Layer w0.2: v1(56.693,52.781) 56.998,53.086 151.461,53.086 152.477,52.07 v1(152.477,49.86) ; v1(152.324,36.754) 153.137,36.754 154.077,35.814 v1(159.004,35.814) ; v1(186.767,16.662) 189.637,13.792 276.911,13.792 J2.7@278.257,12.446 ; v1(187.173,23.724) 188.126,24.677 189.11,24.677 189.834,23.952 190.577,23.952 191.136,23.393 RA5.2@191.136,22.657
  Bottom Layer w0.2: J4.7@1.397,30.226 2.337,31.166 2.337,43.764 9.094,50.521 9.094,52.07 9.805,52.781 v1(56.693,52.781) ; v1(152.324,36.754) 152.959,37.389 152.959,42.52 151.867,43.612 151.867,49.251 v1(152.477,49.86) ; v1(159.004,35.814) 157.557,34.367 157.557,29.718 158.522,28.753 166.116,28.753 166.726,28.143 176.607,28.143 177.242,28.778 184.608,28.778 187.173,26.213 187.173,17.069 v1(186.767,16.662) ; J2.7@278.257,12.446 279.197,13.386 279.197,26.416 278.257,27.356 J3.7@278.257,37.846 278.257,38.659 279.299,39.7 279.299,40.361 280.493,41.554 297.028,41.554 299.466,39.116 302.26,39.116 302.641,38.735 302.641,31.75 J1.7@301.117,30.226
CNT8: J1.8 J2.8 J3.8 J4.8 RA5.1 | length 363.2
  Top Layer w0.2: J4.8@3.937,30.226 17.145,30.226 17.958,29.413 17.958,13.056 23.114,7.899 62.18,7.899 62.853,7.226 63.614,7.226 63.958,7.569 97.675,7.569 98.222,7.022 99.149,7.022 99.848,7.722 110.973,7.722 v1(111.506,8.255) ; v1(184.43,22.149) 184.811,21.768 184.811,20.168 185.166,19.812 186.208,19.812 187.427,21.031 191.948,21.031 192.939,22.022 v1(278.257,22.022) 285.496,29.261 302.692,29.261 J1.8@303.657,30.226 ; RA5.1@192.406,22.657 192.939,22.657 193.574,22.022
  Bottom Layer w0.2: v1(111.506,8.255) 111.913,8.661 125.73,8.661 128.422,5.969 133.858,5.969 134.074,5.753 144.018,5.753 145.199,4.572 152.158,4.572 153.339,5.753 154.075,5.753 155.129,6.807 169.952,6.807 175.565,12.421 175.565,13.284 v1(184.43,22.149) ; J2.8@278.257,14.986 v1(278.257,22.022) 277.318,22.962 277.318,38.303 278.257,39.243 J3.8@278.257,40.386
CNT9: J1.9 J2.9 J3.9 J4.9 RA6.4 | length 384
  Top Layer w0.2: v1(13.615,9.601) 17.171,9.601 20.114,6.658 29.617,6.658 30.001,6.274 61.042,6.274 61.296,6.02 64.948,6.02 65.202,6.274 90.551,6.274 90.856,5.969 96.628,5.969 96.774,5.822 102.179,5.822 102.312,5.69 107.392,5.69 107.722,5.359 116.129,5.359 116.459,5.69 118.771,5.69 121.285,8.204 139.827,8.204 140.513,7.518 143.079,7.518 143.942,8.382 154.051,8.382 155.375,9.706 158.95,9.706 159.639,9.017 161.182,9.017 161.367,8.832 164.534,8.832 166.554,10.852 169.996,10.852 v1(170.561,10.287) 175.133,10.287 175.387,10.033 179.07,10.033 179.324,9.779 181.814,9.779 v1(183.134,8.458) ; RA6.4@171.324,22.657 171.324,21.488 172.391,20.422 176.454,20.422 176.911,19.964 v1(176.911,16.612) ; v1(185.852,11.176) 186.259,10.77 279.121,10.77 J2.9@280.797,12.446
  Bottom Layer w0.2: J4.9@1.397,27.686 2.998,26.086 2.998,19.558 3.506,19.05 4.166,19.05 v1(13.615,9.601) ; v1(170.561,10.287) 172.258,11.984 172.843,11.984 176.911,16.053 v1(176.911,16.612) ; v1(183.134,8.458) v1(185.852,11.176) ; J3.9@280.797,37.846 280.797,28.55 281.737,27.61 281.737,13.386 J2.9@280.797,12.446 282.626,10.617 299.873,10.617 302.464,13.208 302.464,26.34 J1.9@301.117,27.686
CNT10: J1.10 J2.10 J3.10 J4.10 RA6.3 | length 368.2
  Top Layer w0.2: J4.10@3.937,27.686 9.83,27.686 10.999,26.518 10.999,17.094 20.6,7.493 28.896,7.493 28.931,7.458 30.134,7.458 30.404,7.188 62.078,7.188 62.441,6.826 64.027,6.826 64.364,7.163 97.047,7.163 97.587,6.622 100.729,6.622 101.346,7.239 113.538,7.239 115.824,9.525 125.857,9.525 v1(126.619,10.287) ; RA6.3@172.594,22.657 172.594,21.59 173.102,21.082 183.744,21.082 184.074,20.752 184.074,19.914 184.582,19.406 186.665,19.406 187.884,20.625 196.647,20.625 197.46,19.812 279.68,19.812 280.797,18.694 ; J2.10@280.797,14.986 280.797,20.777 286.665,26.645 302.616,26.645 J1.10@303.657,27.686
  Bottom Layer w0.2: v1(126.619,10.287) 129.565,7.341 134.939,7.341 135.726,6.553 144.45,6.553 145.631,5.372 151.826,5.372 153.007,6.553 153.744,6.553 154.811,7.62 163.576,7.62 177.038,21.082 v1(177.75,21.082) ; J2.10@280.797,14.986 280.797,27.026 279.858,27.965 279.858,38.659 280.315,39.116 280.493,39.116 280.797,39.421 J3.10@280.797,40.386
CNT11: J1.11 J2.11 J3.11 J4.11 RA6.2 | length 404.2
  Top Layer w0.2: v1(2.337,12.649) 8.738,6.248 17.78,6.248 18.17,5.858 28.33,5.858 28.804,5.385 60.344,5.385 60.522,5.207 65.812,5.207 65.99,5.385 89.815,5.385 90.145,5.055 95.955,5.055 95.987,5.022 101.709,5.022 101.854,4.877 106.096,4.877 106.426,4.547 117.094,4.547 117.425,4.877 121.133,4.877 123.648,7.391 139.091,7.391 139.777,6.706 143.789,6.706 144.996,5.499 153.459,5.499 155.536,7.576 159.429,7.576 160.09,6.915 165.538,6.915 v1(166.751,8.128) ; v1(176.937,21.844) 176.835,21.742 174.118,21.742 173.864,21.996 RA6.2@173.864,22.657 173.864,23.952 173.457,24.359 173.457,25.248 173.679,25.469 174.752,25.469 174.974,25.248 180.322,25.248 181.389,26.314 190.698,26.314 191.333,25.679 261.57,25.679 271.984,36.093 271.984,41.097 273.05,42.164 288.824,42.164 289.357,41.631 289.357,37.719 290.83,36.246 304.165,36.246 304.597,35.814 304.597,27.28 303.53,26.213 303.251,26.213 302.184,25.146 J1.11@301.117,25.146 ; J3.11@283.337,37.846 284.607,39.116 289.357,39.116
  Bottom Layer w0.2: J4.11@1.397,25.146 2.337,24.206 v1(2.337,12.649) ; v1(166.751,8.128) 166.751,10.21 176.632,20.091 178.246,20.091 178.512,20.357 178.512,21.412 178.08,21.844 v1(176.937,21.844) ; J2.11@283.337,12.446 284.277,13.386 284.277,26.187 283.337,27.127 J3.11@283.337,37.846
CNT12: J1.12 J2.12 J3.12 J4.12 RA6.1 | length 394.2
  Top Layer w0.2: v1(17.145,5.461) 17.148,5.458 28.118,5.458 28.776,4.801 66.218,4.801 66.396,4.978 89.434,4.978 89.79,4.622 101.347,4.622 101.575,4.394 105.461,4.394 105.817,4.039 117.425,4.039 117.856,4.47 121.292,4.47 123.807,6.985 138.862,6.985 139.548,6.299 143.561,6.299 144.761,5.099 153.625,5.099 155.702,7.176 159.194,7.176 159.855,6.515 167.17,6.515 167.945,7.29 v1(167.945,8.738) 168.554,8.738 168.961,8.331 175.87,8.331 177.115,7.087 248.997,7.087 249.479,7.569 286.208,7.569 286.817,8.179 286.817,13.081 286.182,13.716 284.607,13.716 J2.12@283.337,14.986 283.337,19.406 287.732,23.8 303.251,23.8 303.657,24.206 J1.12@303.657,25.146 ; RA6.1@175.134,22.657 v1(177.724,22.657)
  Bottom Layer w0.2: J4.12@3.937,25.146 16.333,25.146 17.145,24.333 v1(17.145,5.461) ; v1(167.945,8.738) 167.945,9.627 178.004,19.685 178.486,19.685 178.918,20.117 178.918,22.174 178.435,22.657 v1(177.724,22.657) ; J2.12@283.337,14.986 283.337,26.543 282.398,27.483 282.398,38.659 282.855,39.116 282.931,39.116 283.337,39.522 J3.12@283.337,40.386
CNT13: J1.13 J2.13 J3.13 J4.13 RA7.4 | length 399.1
  Top Layer w0.2: J4.13@1.397,22.606 2.667,21.336 9.017,21.336 10.11,20.244 10.11,9.398 12.853,6.655 18.492,6.655 18.888,6.258 28.743,6.258 29.21,5.791 60.719,5.791 60.896,5.613 65.431,5.613 65.609,5.791 90.196,5.791 90.526,5.461 96.329,5.461 96.368,5.422 101.893,5.422 102.032,5.283 106.655,5.283 106.985,4.953 116.536,4.953 116.866,5.283 119.685,5.283 122.2,7.798 139.664,7.798 140.35,7.112 143.479,7.112 144.343,7.976 154.534,7.976 155.702,9.144 158.75,9.144 159.311,8.583 160.835,8.583 161.036,8.382 164.719,8.382 166.751,10.414 169.164,10.414 170.307,9.271 181.051,9.271 182.626,7.696 199.34,7.696 200.432,8.788 284.557,8.788 285.877,10.109 J2.13@285.877,12.446 ; RA7.4@179.452,22.657 179.452,23.419 180.468,24.435 181.026,24.435 181.737,25.146 185.598,25.146 185.929,25.477 190.17,25.477 190.882,24.765 195.834,24.765 v1(196.622,23.978)
  Bottom Layer w0.2: v1(196.622,23.978) v1(211.811,8.788) ; J3.13@285.877,37.846 285.877,27.356 286.817,26.416 286.817,13.386 J2.13@285.877,12.446 286.919,11.405 289.052,11.405 289.052,11.43 289.433,11.811 289.433,13.385 289.764,13.716 289.764,21.59 290.78,22.606 J1.13@301.117,22.606
CNT14: J1.14 J2.14 J3.14 J4.14 RA7.3 | length 395.3
  Top Layer w0.2: J4.14@3.937,22.606 3.937,23.266 3.328,23.876 2.998,23.876 2.998,30.937 3.277,31.217 17.552,31.217 26.899,21.869 26.899,13.64 28.093,12.446 97.486,12.446 99.772,14.732 104.521,14.732 105.283,15.494 122.555,15.494 v1(123.317,14.732) ; RA7.3@180.722,22.657 180.722,23.496 181.102,23.876 181.534,23.876 v1(182.017,24.359) 185.534,24.359 186.252,25.077 189.764,25.077 190.482,24.359 192.583,24.359 193.904,23.038 273.152,23.038 274.778,24.663 274.778,40.894 275.209,41.326 284.938,41.326 J3.14@285.877,40.386 ; J2.14@285.877,14.986 285.877,20.244 286.995,21.361 301.346,21.361 302.387,22.403 302.387,22.606 J1.14@303.657,22.606
  Bottom Layer w0.2: v1(123.317,14.732) 123.317,9.398 123.654,9.061 126.194,9.061 128.886,6.369 134.404,6.369 134.62,6.153 144.215,6.153 145.396,4.972 151.992,4.972 153.173,6.153 153.91,6.153 154.97,7.214 167.59,7.214 169.622,9.246 169.622,10.668 178.08,19.126 179.883,19.126 180.721,19.964 180.721,23.063 v1(182.017,24.359) ; J2.14@285.877,14.986 285.877,25.476 284.938,26.416 284.938,38.684 285.877,39.624 J3.14@285.877,40.386
CNT15: J1.15 J2.15 J3.15 J4.15 RA7.2 | length 378.1
  Top Layer w0.2: J4.15@1.397,20.066 2.591,18.872 v1(8.001,18.872) ; v1(14.326,12.548) 14.91,12.548 20.371,7.087 28.496,7.087 28.525,7.058 29.925,7.058 30.303,6.68 61.697,6.68 61.952,6.426 64.541,6.426 64.796,6.68 96.723,6.68 97.181,6.222 103.276,6.222 v1(103.505,6.452) ; v1(103.505,3.632) 117.831,3.632 118.263,4.064 122.251,4.064 124.765,6.579 138.405,6.579 139.091,5.893 143.256,5.893 144.45,4.699 154.051,4.699 156.128,6.776 158.959,6.776 159.62,6.115 167.43,6.115 168.529,7.214 169.114,7.214 169.469,7.569 v1(169.596,7.569) 169.952,7.925 175.032,7.925 176.276,6.68 250.14,6.68 250.292,6.833 287.478,6.833 288.417,7.772 J2.15@288.417,12.446 287.478,13.386 287.478,19.152 288.392,20.066 J1.15@301.117,20.066 ; RA7.2@181.992,22.657 181.992,23.571 v1(184.379,23.571)
  Bottom Layer w0.2: v1(8.001,18.872) v1(14.326,12.548) ; v1(103.505,3.632) v1(103.505,6.452) ; v1(169.596,7.569) 173.584,11.557 173.584,11.938 183.668,22.022 183.668,22.86 v1(184.379,23.571) ; J2.15@288.417,12.446 288.417,13.462 289.357,14.402 289.357,26.416 288.417,27.356 J3.15@288.417,37.846